# Altium PCB DSKY_keyboard.PcbDoc
Units mm, origin at the board's own origin, x right, y up, seen from the top; angles counter-clockwise.
Board outline 168.42 x 69.64 mm, 2 copper layers (F.Cu, B.Cu); 64 components, 44 nets, 255 pads, 79 vias.
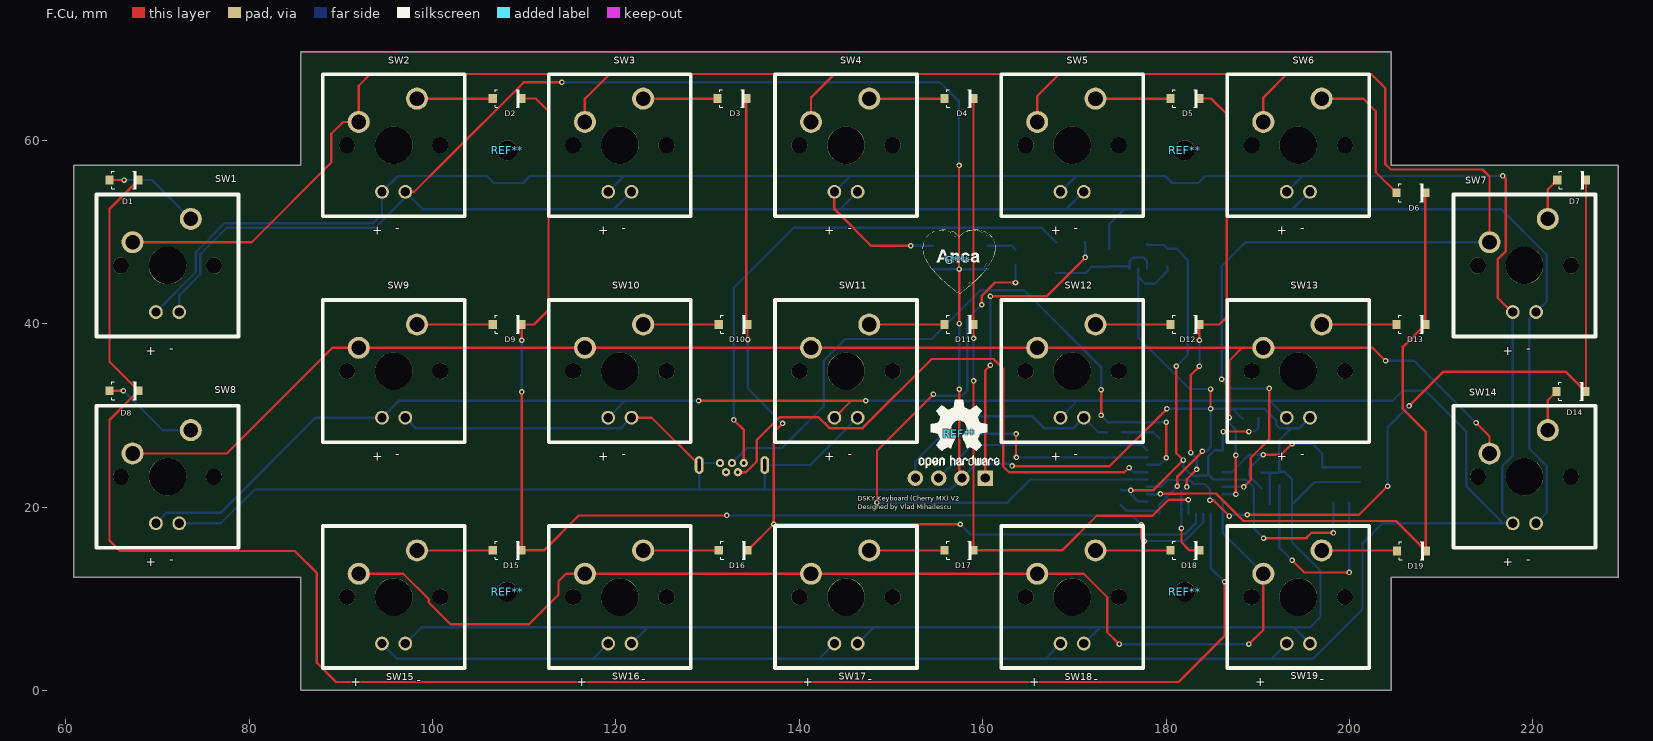
[diagram p0: F.Cu view]
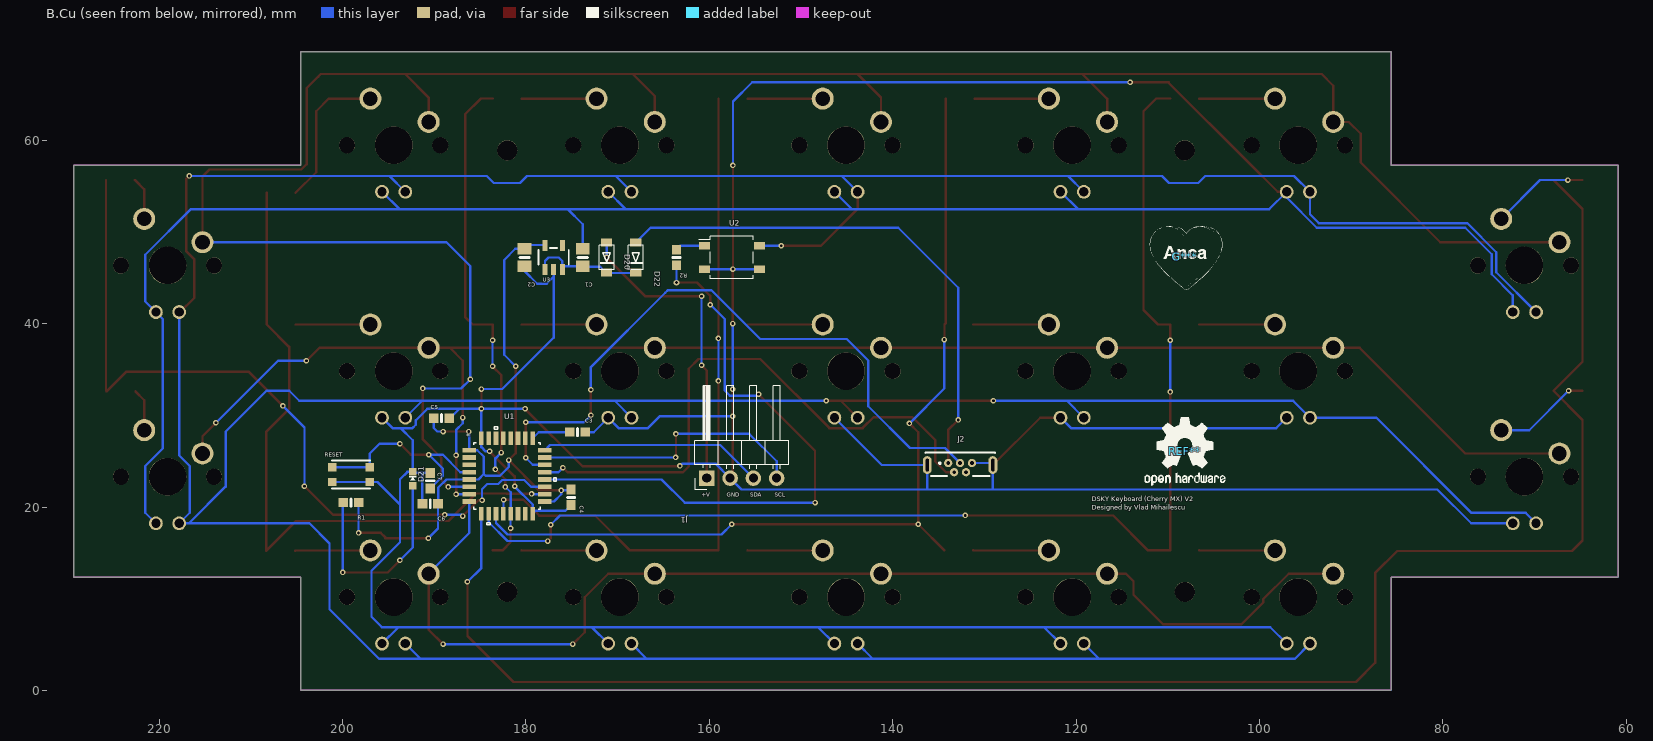
[diagram p1: B.Cu view, seen from below]

## Layer stack, top to bottom
F.Mask: solder mask 0.0102, Solder Resist, Dk 3.5
F.Cu: signal copper 0.0356
Dielectric 1: dielectric 0.32, FR-4, Dk 4.8
B.Cu: signal copper 0.0356
B.Mask: solder mask 0.0102, Solder Resist, Dk 3.5

## Board outline
60.881,12.351 85.622,12.351 85.622,0 204.561,0 204.561,12.351 229.301,12.351 229.301,57.289 204.561,57.289 204.561,69.64 85.622,69.64 85.622,57.289 60.881,57.289 60.881,12.351

## Design rules (kind name [scope] priority, off if disabled: settings)
Clearance "Clearence 2_PadClass" [InPadClass('Pad Class Clearance 2')] p1: gap=2 ignorepadtopadclearanceinfootprint=FALSE
Clearance "Clearence 0.254_NetClass" [InNetClass('Default')] p2: gap=0.254 ignorepadtopadclearanceinfootprint=FALSE
HoleSize "Hole Size (Default)" [All] p1: absolutevalues=TRUE maxlimit=10 minlimit=0.3 maxpercent=80.000 minpercent=20.000
MinimumSolderMaskSliver [All] p1: minsoldermaskwidth=0
PolygonConnect [All] p1: connectstyle=Direct reliefconductorwidth=0.254 reliefentries=4 polygonreliefangle="90 Angle" airgapwidth=0.254
RoutingVias [All] p1: holewidth=0.711 width=1.27 viastyle="Through Hole" minholewidth=0.711 minwidth=1.27 maxholewidth=0.711 maxwidth=1.27
SilkToSilkClearance [All] p1: silktosilkclearance=0
SilkToSolderMaskClearance [IsPad] p1: minsilkscreentomaskgap=0 clearancetoexposedcopper=TRUE
SolderMaskExpansion [All] p1: expansion=0.102 istentingtop=FALSE
Width [All] p1: maxlimit=10 minlimit=0.254 preferedwidth=0.254 minimp=50.000000 maximp=50.000000 favimp=50.000000
26 further rules are at their usual default settings.

## Classes and differential pairs
pad class "Pad Class Clearance 2": REF**-1
net class Default: +3V3 GND Net-(C1-Pad1) Net-(C3-Pad1) Net-(D1-Pad2) Net-(D2-Pad2) Net-(D3-Pad2) Net-(D4-Pad2) Net-(D5-Pad2) Net-(D6-Pad2) Net-(D7-Pad2) Net-(D8-Pad2) Net-(D9-Pad2) Net-(D10-Pad2) Net-(D11-Pad2) Net-(D12-Pad2) Net-(D13-Pad2) Net-(D14-Pad2) Net-(D15-Pad2) Net-(D16-Pad2) Net-(D17-Pad2) Net-(D18-Pad2) Net-(D19-Pad2) Net-(D21-Pad2) Net-(R2-Pad1) Net-(R2-Pad2) Net-(SW1-PadLED+) PA00 PA01 PA02 PA03 PA04 PA05 PA06 PA07 PA08 PA09 PA11 PA12 PA13 PA14 R\E\S\E\T\ VBAT VBUS

## Components (designator, comment, footprint, x,y, rotation, side; value= is the part's Value field where it differs from the comment)
C1 "10uF" 0805-NO 173.799,47.212 r270 bottom
C2 "10uF" 0805-NO 180.149,47.212 r90 bottom
C3 "1uF" 0603-NO 174.371,28.162 r0 bottom
C4 "1uF" 0603-NO 175.07,21.05 r90 bottom
C5 "1uF" 0603-NO 189.205,29.686 r180 bottom
C6 "1uF" 0603-NO 190.436,20.352 r0 bottom
C7 "0.1uF" 0603-NO 190.436,22.867 r270 bottom
D1 "1N4148" SOD-123 66.358,55.658 r180 top
D2 "1N4148" SOD-123 108.14,64.548 r180 top
D3 "1N4148" SOD-123 132.651,64.548 r180 top
D4 "1N4148" SOD-123 157.416,64.548 r180 top
D5 "1N4148" SOD-123 182.054,64.548 r180 top
D6 "1N4148" SOD-123 206.692,54.261 r180 top
D7 "1N4148" SOD-123 224.218,55.658 r180 top
D8 "1N4148" SOD-123 66.358,32.671 r180 top
D9 "1N4148" SOD-123 108.14,39.91 r180 top
D10 "1N4148" SOD-123 132.779,39.91 r180 top
D11 "1N4148" SOD-123 157.416,39.91 r180 top
D12 "1N4148" SOD-123 182.054,39.91 r180 top
D13 "1N4148" SOD-123 206.692,39.91 r180 top
D14 "1N4148" SOD-123 224.155,32.607 r180 top
D15 "1N4148" SOD-123 108.14,15.272 r180 top
D16 "1N4148" SOD-123 132.779,15.272 r180 top
D17 "1N4148" SOD-123 157.416,15.272 r180 top
D18 "1N4148" SOD-123 182.054,15.272 r180 top
D19 "1N4148" SOD-123 206.756,15.208 r180 top
D20 "D_Schottky_30V" SOD-123FL 171.196,47.212 r270 bottom
D21 "LED" CHIPLED_0603_NOOUTLINE 192.341,23.082 r0 bottom
D22 "D_Schottky_30V" SOD-123FL 168.021,47.212 r270 bottom
G*** "LOGO" anca 157.29,46.895 r0 top
G*** "LOGO" anca 108.14,47.276 r0 bottom
J1 "Conn_01x04_Male" PinHeader_1x04_P2.54mm_Horizontal 160.274,23.146 r270 bottom
J2 "614105150721" 614105150721 132.651,24.67 r0 bottom
R1 "1.5K" 0603-NO 199.072,20.479 r180 bottom
R2 "1.1K" 0603-NO 163.576,47.212 r90 bottom
REF** "OSHW-Logo2_9.8x8mm_SilkScreen" OSHW-Logo2_9.8x8mm_SilkScreen 108.14,26.067 r0 bottom
REF** "OSHW-Logo2_9.8x8mm_SilkScreen" OSHW-Logo2_9.8x8mm_SilkScreen 157.416,27.972 r0 top
REF** "MountingHole_2.2mm_M2" MountingHole_2.2mm_M2 108.141,10.744 r0 top
REF** "MountingHole_2.2mm_M2" MountingHole_2.2mm_M2 182.041,10.744 r0 top
REF** "MountingHole_2.2mm_M2" MountingHole_2.2mm_M2 182.041,58.896 r0 top
REF** "MountingHole_2.2mm_M2" MountingHole_2.2mm_M2 108.141,58.896 r0 top
RESET "SWITCH_TACT_SMT4.6X2.8" BTN_KMR2_4.6X2.8 199.072,23.527 r180 bottom
SW1 "SW_SPST_LED" CHERRYMX-NN-LED 71.099,46.339 r0 top
SW2 "SW_SPST_LED" CHERRYMX-NN-LED 95.763,59.455 r0 top
SW3 "SW_SPST_LED" CHERRYMX-NN-LED 120.427,59.455 r0 top
SW4 "SW_SPST_LED" CHERRYMX-NN-LED 145.091,59.455 r0 top
SW5 "SW_SPST_LED" CHERRYMX-NN-LED 169.755,59.455 r0 top
SW6 "SW_SPST_LED" CHERRYMX-NN-LED 194.419,59.455 r0 top
SW7 "SW_SPST_LED" CHERRYMX-NN-LED 219.083,46.339 r0 top
SW8 "SW_SPST_LED" CHERRYMX-NN-LED 71.099,23.301 r0 top
SW9 "SW_SPST_LED" CHERRYMX-NN-LED 95.763,34.82 r0 top
SW10 "SW_SPST_LED" CHERRYMX-NN-LED 120.427,34.82 r0 top
SW11 "SW_SPST_LED" CHERRYMX-NN-LED 145.091,34.82 r0 top
SW12 "SW_SPST_LED" CHERRYMX-NN-LED 169.755,34.82 r0 top
SW13 "SW_SPST_LED" CHERRYMX-NN-LED 194.419,34.82 r0 top
SW14 "SW_SPST_LED" CHERRYMX-NN-LED 219.083,23.301 r0 top
SW15 "SW_SPST_LED" CHERRYMX-NN-LED 95.763,10.185 r0 top
SW16 "SW_SPST_LED" CHERRYMX-NN-LED 120.427,10.185 r0 top
SW17 "SW_SPST_LED" CHERRYMX-NN-LED 145.091,10.185 r0 top
SW18 "SW_SPST_LED" CHERRYMX-NN-LED 169.755,10.185 r0 top
SW19 "SW_SPST_LED" CHERRYMX-NN-LED 194.419,10.185 r0 top
U1 "STM32F042K6T6" STM32F042K6T6 182.054,23.4 r0 bottom
U2 "AQY232SZ" SO-4_4.4x4.3mm_P2.54mm 157.543,47.212 r0 bottom
U3 "AP2112K-3.3" SOT23-5 176.975,47.212 r0 bottom

## Footprints (in the part's own frame and the unit in brackets; to place one, negate y for a bottom-side part, rotate by r counter-clockwise, add the part's x,y. Pads: shape width x height; smd on the part's side, far side on the other; paste and mask are expansions set on the pad)
0603-NO [mm]
  rect 1.075x1 smd mask+0.051: 1(0.85,0) 2(-0.85,0)
  silkscreen extent 0,-0.4 0,0.4
0805-NO [mm]
  rect 1.24x1.5 smd mask+0.051: 1(0.95,0) 2(-0.95,0)
  silkscreen extent 0,-0.51 0,0.51
614105150721 [mm]
  round 0.908 hole 0.4 paste-0.908 mask+0.05: 1(1.3,-0.125) 2(0.65,0.875) 3(0,-0.125) 4(-0.65,0.875) 5(-1.3,-0.125)
  rrect100% 0.97x1.94 hole 1.35 slot 0.35 at 0 deg paste-1.94 mask+0.05: S1(3.575,0.095) S2(-3.575,0.095)
  silkscreen extent -3.8,-1.28 3.8,1.28
anca [mm]
  silkscreen extent -3.8,-3.59 4.08,3.34
BTN_KMR2_4.6X2.8 [mm]
  rect 0.9x0.9 smd mask+0.051: A(-2.05,-0.8) A'(2.05,-0.8) B(-2.05,0.8) B'(2.05,0.8)
  silkscreen extent -2.1,-1.53 2.1,1.53
CHERRYMX-NN-LED [mil]
  round 59.37 hole 39.37 paste-59.37 mask+4: LED+(-50,-200) LED-(50,-200)
  round 94.49 hole 62.99 paste-94.49 mask+4: SIDE(-150,100) UP(100,200)
  round 69 hole 69 paste-69 mask+1.97: Un1(-200,0) Un2(200,0)
  round 161 hole 161 paste-161 mask+1.97: Un3(0,0)
  silkscreen extent -305,-305 305,305
CHIPLED_0603_NOOUTLINE [mm]
  rect 0.8x0.8 smd mask+0.051: 1(0,-0.75) 2(0,0.75)
  silkscreen extent -0.38,-0.27 0.38,0.18
MountingHole_2.2mm_M2 [mm]
  round 2.2 hole 2.2 paste-2.2 mask+1: 1(0,0)
OSHW-Logo2_9.8x8mm_SilkScreen [mm]
  silkscreen extent -4.4,-3.71 4.4,3.73
PinHeader_1x04_P2.54mm_Horizontal [mm]
  rect 1.7x1.7 hole 1 paste-1.7 mask+0.05: 1(0,0)
  rrect100% 1.7x1.7 hole 1 paste-1.7 mask+0.05: 2(0,2.54) 3(0,5.08) 4(0,7.62)
  silkscreen extent -10.1,-1.33 1.27,8.95
SO-4_4.4x4.3mm_P2.54mm [mm]
  rect 1.2x0.8 smd mask+0.05: 1(3,-1.27) 2(3,1.27) 3(-3,1.27) 4(-3,-1.27)
  silkscreen extent -2.35,-2.3 3.6,2.3
SOD-123 [mm]
  rect 0.9x0.95 smd mask+0.05: 1(-1.575,0) 2(1.575,0)
  silkscreen extent -1.33,-0.97 1.33,0.97
SOD-123FL [mm]
  rect 0.91x1.22 smd mask+0.051: 1(1.637,0) 2(-1.637,0)
  silkscreen extent -1.35,-0.82 1.35,0.82
SOT23-5 [mm]
  rect 0.55x1.2 smd mask+0.051: 1(0.95,1.3) 2(0,1.3) 3(-0.95,1.3) 4(-0.95,-1.3) 5(0.95,-1.3)
  silkscreen extent -1.65,-1.05 1.65,0.8
STM32F042K6T6 [mm]
  rect 1.462x0.507 smd mask+0.05: 1(4.115,-2.8) 2(4.115,-2) 3(4.115,-1.2) 4(4.115,-0.4) 5(4.115,0.4) 6(4.115,1.2) 7(4.115,2) 8(4.115,2.8) 17(-4.115,2.8) 18(-4.115,2) 19(-4.115,1.2) 20(-4.115,0.4) 21(-4.115,-0.4) 22(-4.115,-1.2) 23(-4.115,-2) 24(-4.115,-2.8)
  rect 0.507x1.462 smd mask+0.05: 9(2.8,4.115) 10(2,4.115) 11(1.2,4.115) 12(0.4,4.115) 13(-0.4,4.115) 14(-1.2,4.115) 15(-2,4.115) 16(-2.8,4.115) 25(-2.8,-4.115) 26(-2,-4.115) 27(-1.2,-4.115) 28(-0.4,-4.115) 29(0.4,-4.115) 30(1.2,-4.115) 31(2,-4.115) 32(2.8,-4.115)
  silkscreen extent -5.35,-5.35 3.63,5.35

## Part data
C1 C2: library part 0805-NO
C3 C4 C5 C6 C7 R1 R2: library part 0603-NO
D1 D2 D3 D4 D5 D6 D7 D8 D9 D10 D11 D12 D13 D14 D15 D16 D17 D18 D19: library part SOD-123
D20 D22: library part SOD-123FL
D21: library part CHIPLED_0603_NOOUTLINE
G*** G***: library part anca
J1: library part PinHeader_1x04_P2.54mm_Horizontal, "Through hole angled pin header, 1x04, 2.54mm pitch, 6mm pin length, single row"
J2: "<b>WR-COM</b><br> Micro USB 2.0 Type B Vertical 5 Contacts"
REF** REF**: "Open Source Hardware Symbol"
REF** REF** REF** REF**: "Mounting Hole 2.2mm, no annular, M2"
RESET: library part BTN_KMR2_4.6X2.8
SW1 SW2 SW3 SW4 SW5 SW6 SW7 SW8 SW9 SW10 SW11 SW12 SW13 SW14 SW15 SW16 SW17 SW18 SW19: library part CHERRYMX-NN-LED
U2: library part SO-4_4.4x4.3mm_P2.54mm, "4-Lead Plastic Small Outline (SO), see https://docs.broadcom.com/docs/AV02-0173EN"
U3: library part SOT23-5, "<b>Small Outline Transistor</b> - 5 Pin"

## Via types
v1: diameter 0.6, hole 0.3, F.Cu to B.Cu, tented both sides, 79 vias

## Nets (pads, with @x,y where several pads share a name; then routed paths per layer and width w, separated by ;. In a path a pad name is that pad's centre, name@x,y a point inside that pad or via, vN(x,y) a via of type N, cw(c..) or ccw(c..) an arc to the next point about the centre after c; other vN are vias at no path point)
+3V3: C2.1 C4.1 C5.2 C6.2 R1.1 U1.1 U1.5 U1.17 U3.5 | length 76.3
  F.Cu w0.254: v1(176.149,21.812) 178.562,21.812 v1(181.864,25.114) 181.102,25.876 181.102,32.607 v1(181.102,35.338) ; v1(186.245,28.226) v1(189.04,28.226) ; v1(190.627,16.605) 195.326,16.605 195.326,16.669 195.834,17.177 v1(198.247,17.177)
  B.Cu w0.254: C4.1 175.158,21.812 v1(176.149,21.812) ; v1@176.124,21.837 v1(176.149,21.812) ; U1.17 176.937,20.6 176.149,21.388 v1(176.149,21.812) ; U3.5@178.021,48.673 177.925,48.576 179.736,48.576 C2.1 181.154,48.162 182.372,46.944 182.372,36.608 v1(181.102,35.338) ; v1(181.864,25.114) 181.864,24.372 182.826,23.41 184.415,23.41 184.594,23.59 ; U1.5@186.15,23.019 U1.5 ; v1(186.245,28.226) 186.169,28.15 U1.1 185.299,26.2 184.594,25.496 184.594,23.59 ; v1(189.04,28.226) 189.674,28.226 190.055,28.607 C5.2 ; v1(190.627,16.605) 189.586,17.646 C6.2 189.555,20.383 189.555,22.114 188.669,23 U1.5 ; R1.1 198.247,20.454 v1(198.247,17.177) ; 184.594,23.59 185.184,23 U1.5
GND: C1.2 C2.2 C3.2 C4.2 C5.1 C6.1 C7.2 D21.1 J1.2 J2.5 J2.S1 J2.S2 RESET.A RESET.A' SW1.LED- SW2.LED- SW3.LED- SW4.LED- SW5.LED- SW6.LED- SW7.LED- SW8.LED- SW9.LED- SW10.LED- SW11.LED- SW12.LED- SW13.LED- SW14.LED- SW15.LED- SW16.LED- SW17.LED- SW18.LED- SW19.LED- U1.16 U1.32 U2.2 U2.3 U3.2 | length 725.8
  F.Cu w0.254: SW2.LED- 98.003,54.375 101.237,57.609 ; 100.658,57.029 101.237,57.609 ; v1(114.109,66.326) 109.883,66.326 109.883,66.254 101.237,57.609 ; SW10.LED- 123.911,29.74 J2.S2 ; v1@157.416,40.037 v1(157.448,40.005) ; v1(157.416,57.245) v1(157.416,45.942) 157.448,45.911 v1(157.448,40.005) ; v1(157.448,32.83) v1(157.448,29.909) 157.448,23.432 J1.2 ; v1@157.48,39.973 v1(157.448,40.005) ; v1(163.195,24.479) 163.241,24.433 173.817,24.433 v1(180.086,30.702) ; v1(181.229,22.257) 181.229,23.336 v1(183.959,26.067) ; v1(184.849,30.702) v1(184.849,32.861)
  B.Cu w0.254: SW8.LED- 76.912,18.221 80.606,21.915 129.071,21.915 ; SW1.LED-@72.418,41.307 SW1.LED- 72.369,43.081 74.676,45.387 74.676,47.574 77.553,50.451 93.746,50.451 97.033,53.738 SW2.LED- 98.925,52.483 99.758,52.483 118.681,52.483 ; SW15.LED- 98.818,6.89 123.698,6.89 ; SW9.LED- 98.168,28.605 120.562,28.605 SW10.LED- ; v1(114.109,66.326) 155.321,66.326 157.416,64.23 157.416,63.468 v1(157.416,57.245) ; SW16.LED- 123.482,6.89 123.698,6.89 ; SW3.LED- 119.805,52.483 118.681,52.483 ; J2.5 129.297,24.795 J2.S2 129.077,21.92 129.071,21.915 ; J2.S1@136.006,24.795 J2.S1 ; SW17.LED- 148.082,6.826 148.082,6.89 ; SW11.LED- 141.196,24.575 J2.S1 ; SW4.LED- 144.469,52.483 143.002,52.483 ; U2.3 v1(157.416,45.942) U2.2 ; v1(157.448,29.909) 165.386,29.909 166.69,28.605 169.89,28.605 SW12.LED- 172.602,28.162 C3.2 ; v1(157.448,32.83) v1(157.448,40.005) ; v1(163.195,24.479) 162.941,24.733 159.321,24.733 J1.2 156.503,21.915 136.246,21.915 ; SW18.LED- 172.784,6.864 172.784,6.89 ; SW5.LED- 169.133,52.483 167.894,52.483 ; C1.2 173.799,50.832 175.451,52.483 ; C4.2 175.68,19.59 178.95,19.59 U1.16 179.255,20.27 181.229,22.245 v1(181.229,22.257) ; v1(180.086,30.702) 187.261,30.702 ; C2.2 180.149,45.752 178.752,44.355 177.737,44.355 176.975,45.117 176.975,45.976 176.975,38.458 182.571,32.861 v1(184.849,32.861) ; v1(183.959,26.067) 184.392,26.067 184.854,26.53 U1.32 184.854,30.696 v1(184.849,30.702) ; C5.1 188.278,29.686 187.261,30.702 ; C7.2 191.326,23.717 ; C6.1 191.318,20.383 191.318,23.71 191.326,23.717 ; 193.904,6.89 SW19.LED- ; SW13.LED-@195.578,29.74 SW13.LED- 194.553,28.605 193.677,28.605 ; SW6.LED- 193.797,52.483 190.817,52.483 ; RESET.A RESET.A' 196.177,22.727 193.738,20.288 ; SW14.LED- 221.508,19.377 221.508,24.465 219.599,26.375 219.599,40.505 SW7.LED- 221.508,42.415 221.508,47.503 216.529,52.483 195.707,52.483 190.817,52.483 ; 118.681,52.483 121.666,52.483 143.002,52.483 ; 123.698,6.89 146.431,6.89 148.082,6.89 ; 129.071,21.915 134.835,21.915 136.246,21.915 ; J2.S1 136.226,21.935 136.246,21.915 ; 143.002,52.483 146.368,52.483 167.894,52.483 ; 148.082,6.89 168.275,6.89 171.069,6.89 172.784,6.89 ; 167.894,52.483 171.069,52.483 175.451,52.483 ; 172.784,6.89 195.707,6.89 196.844,8.027 196.844,13.039 193.738,16.145 193.738,19.717 193.738,20.288 ; 175.451,52.483 190.817,52.483 ; 187.261,30.702 190.763,30.702 190.763,30.694 192.013,29.443 192.013,28.972 192.38,28.605 193.677,28.605 ; 191.326,23.717 192.226,23.717 D21.1 ; D21.1 192.341,27.269 193.677,28.605 ; D21.1 192.925,23.832 193.738,23.019 193.738,22.003 193.738,20.288
Net-(C1-Pad1): C1.1 D20.1 D22.1 U3.1 U3.3 | length 12.8
  B.Cu w0.254: D22.1 168.084,45.511 D20.1@171.196,45.511 ; D20.1@171.132,45.575 D20.1@171.196,45.511 ; U3.3@175.801,46.199 U3.3@176.024,45.976 ; U3.1@177.925,45.976 177.925,46.83 177.542,47.212 176.407,47.212 176.024,46.83 U3.3@176.024,45.976 ; D20.1@171.196,45.511 171.883,46.199 173.736,46.199 C1.1 175.738,46.262 U3.3@176.024,45.976
Net-(C3-Pad1): C3.1 U1.25 | length 4.3
  B.Cu w0.254: C3.1 178.607,28.162 U1.25
Net-(D1-Pad2): D1.2 SW1.UP | length 10.6
  F.Cu w0.254: D1.2 v1(66.358,55.658)
  B.Cu w0.254: v1(66.358,55.658) 69.4,55.658 SW1.UP
Net-(D2-Pad2): D2.2 SW2.UP | length 8.3
  F.Cu w0.254: SW2.UP 106.552,64.535 D2.2
Net-(D3-Pad2): D3.2 SW3.UP | length 8.1
  F.Cu w0.254: SW3.UP 131.063,64.535 D3.2
Net-(D4-Pad2): D4.2 SW4.UP | length 8.2
  F.Cu w0.254: SW4.UP 155.828,64.535 D4.2
Net-(D5-Pad2): D5.2 SW5.UP | length 8.2
  F.Cu w0.254: SW5.UP 180.466,64.535 D5.2
Net-(D6-Pad2): D6.2 SW6.UP | length 16.3
  F.Cu w0.254: SW6.UP 201.498,64.535 202.87,63.164 202.87,56.509 D6.2
Net-(D7-Pad2): D7.2 SW7.UP | length 4.7
  F.Cu w0.254: SW7.UP 221.623,54.637 D7.2
Net-(D8-Pad2): D8.2 SW8.UP | length 10.6
  F.Cu w0.254: D8.2 v1(66.294,32.671)
  B.Cu w0.254: v1(66.294,32.671) 70.584,28.381 SW8.UP
Net-(D9-Pad2): D9.2 SW9.UP | length 8.3
  F.Cu w0.254: SW9.UP 106.555,39.9 D9.2
Net-(D10-Pad2): D10.2 SW10.UP | length 8.2
  F.Cu w0.254: SW10.UP 131.193,39.9 D10.2
Net-(D11-Pad2): D11.2 SW11.UP | length 8.2
  F.Cu w0.254: SW11.UP 155.831,39.9 D11.2
Net-(D12-Pad2): D12.2 SW12.UP | length 8.2
  F.Cu w0.254: SW12.UP 180.469,39.9 D12.2
Net-(D13-Pad2): D13.2 SW13.UP | length 8.2
  F.Cu w0.254: SW13.UP@196.999,39.859 SW13.UP 205.107,39.9 D13.2
Net-(D14-Pad2): D14.2 SW14.UP | length 4.6
  F.Cu w0.254: SW14.UP 221.623,31.65 D14.2
Net-(D15-Pad2): D15.2 SW15.UP | length 8.3
  F.Cu w0.254: SW15.UP 106.558,15.265 D15.2
Net-(D16-Pad2): D16.2 SW16.UP | length 8.2
  F.Cu w0.254: SW16.UP 131.196,15.265 D16.2
Net-(D17-Pad2): D17.2 SW17.UP | length 8.2
  F.Cu w0.254: SW17.UP 155.834,15.265 D17.2
Net-(D18-Pad2): D18.2 SW18.UP | length 8.2
  F.Cu w0.254: SW18.UP 180.472,15.265 D18.2
Net-(D19-Pad2): D19.2 SW19.UP | length 8.2
  F.Cu w0.254: SW19.UP 205.124,15.265 D19.2
Net-(D21-Pad2): D21.2 R1.2 | length 23.1
  F.Cu w0.254: v1(193.738,14.192) 195.072,12.859 v1(199.962,12.859)
  B.Cu w0.254: D21.2 192.341,15.843 192.341,15.589 v1(193.738,14.192) ; R1.2 199.962,20.44 v1(199.962,12.859)
Net-(R2-Pad1): R2.1 U2.1 | length 3.2
  B.Cu w0.254: U2.1 163.156,48.482 R2.1
Net-(R2-Pad2): R2.2 U1.20 | length 66
  F.Cu w0.254: v1(148.463,20.479) 148.463,26.13 v1(154.623,32.29) ; v1(159.893,42.069) 159.893,43.027 161.348,44.482 v1(163.576,44.482)
  B.Cu w0.254: v1(148.463,20.479) 162.687,20.479 165.208,23 U1.20 ; v1(154.623,32.29) 154.764,32.149 157.775,32.149 158.323,32.697 158.323,40.499 v1(159.893,42.069) ; v1(163.576,44.482) R2.2
Net-(SW1-PadLED+): SW1.LED+ SW2.LED+ SW3.LED+ SW4.LED+ SW5.LED+ SW6.LED+ SW7.LED+ SW8.LED+ SW9.LED+ SW10.LED+ SW11.LED+ SW12.LED+ SW13.LED+ SW14.LED+ SW15.LED+ SW16.LED+ SW17.LED+ SW18.LED+ SW19.LED+ U2.4 | length 554.7
  F.Cu w0.254: v1(129.017,31.576) 143.812,31.576 146.319,31.576 ; SW11.LED+ 145.657,31.576 146.319,31.576 ; SW4.LED+ 143.821,52.49 147.828,48.482 v1(152.146,48.482) ; v1(147.241,31.576) 146.319,31.576 ; SW19.LED+ SW19.LED+@193.167,5.086 ; v1(216.725,56.102) 217.025,55.802 217.025,47.872 216.154,47.001 216.154,42.831 217.726,41.259 SW7.LED+
  B.Cu w0.254: SW8.LED+ 70.965,19.356 76.863,19.356 87.247,29.74 SW9.LED+ 96.329,31.576 119.141,31.576 121.745,31.576 ; SW1.LED+ 74.168,45.597 74.168,47.784 77.343,50.959 93.535,50.959 94.493,51.917 94.493,52.171 SW2.LED+ 96.221,56.102 105.918,56.102 106.68,55.34 109.855,55.34 110.617,56.102 119.444,56.102 ; SW15.LED+ 96.137,3.461 116.713,3.461 ; 119.126,56.102 119.444,56.102 ; SW16.LED+ 117.513,3.461 116.713,3.461 ; SW10.LED+ 120.993,31.576 121.745,31.576 ; SW3.LED+ 120.885,56.102 122.809,56.102 ; v1(129.017,31.576) 121.745,31.576 ; SW17.LED+ 142.177,3.461 141.224,3.461 ; SW4.LED+ 145.548,56.102 147.764,56.102 ; v1(147.241,31.576) 168.481,31.576 170.957,31.576 ; v1(152.146,48.482) U2.4 ; SW18.LED+ 166.841,3.461 165.862,3.461 ; SW12.LED+ 170.321,31.576 170.957,31.576 ; SW5.LED+ 170.212,56.102 173.101,56.102 ; SW19.LED+ 191.504,3.461 ; SW13.LED+ 191.312,31.576 190.261,31.576 ; SW6.LED+ 194.876,56.102 196.723,56.102 ; 194.985,31.576 195.976,31.576 ; v1(216.725,56.102) 196.723,56.102 ; SW14.LED+@217.777,18.256 SW14.LED+ ; SW7.LED+ 217.813,25.621 216.657,24.465 216.657,19.377 SW14.LED+ ; 116.713,3.461 125.222,3.461 141.224,3.461 ; 119.444,56.102 122.809,56.102 ; 122.809,56.102 143.764,56.102 147.764,56.102 ; 141.224,3.461 165.862,3.461 ; 147.764,56.102 168.465,56.102 173.101,56.102 ; 165.862,3.461 190.754,3.461 191.504,3.461 ; 170.957,31.576 190.261,31.576 ; 173.101,56.102 179.895,56.102 180.657,55.34 183.515,55.34 184.277,56.102 196.723,56.102 ; 190.261,31.576 193.152,31.576 195.976,31.576 ; 191.504,3.461 196.024,3.461 201.422,8.858 201.422,16.034 203.609,18.221 SW14.LED+ ; 195.976,31.576 204.709,31.576 205.803,32.671 208.28,32.671 212.745,28.206 212.745,25.793 212.745,22.222 216.746,18.221 SW14.LED+
PA00: SW1.SIDE SW2.SIDE SW3.SIDE SW4.SIDE SW5.SIDE SW6.SIDE SW7.SIDE U1.6 | length 265.2
  F.Cu w0.254: SW1.SIDE@67.846,49.435 SW1.SIDE 80.279,48.879 88.963,57.563 88.963,60.702 90.256,61.995 SW2.SIDE ; SW2.SIDE@91.94,62.008 SW2.SIDE ; SW3.SIDE@116.522,62.09 SW3.SIDE 116.617,64.516 119.316,67.215 ; SW4.SIDE 141.281,64.668 143.827,67.215 ; SW5.SIDE 165.945,64.821 168.338,67.215 ; v1(188.468,22.193) 189.23,22.955 189.23,25.368 191.262,27.4 v1(191.262,32.925) ; SW6.SIDE 190.609,64.657 193.167,67.215 ; 202.394,67.196 202.66,66.929 ; SW7.SIDE 215.273,55.777 215.273,56.031 214.503,56.801 204.492,56.801 203.898,57.394 203.898,65.691 202.66,66.929 ; SW2.SIDE 91.953,65.95 93.218,67.215 116.522,67.215 119.316,67.215 ; 119.316,67.215 141.274,67.215 143.827,67.215 ; 143.827,67.215 165.989,67.215 168.338,67.215 ; 168.338,67.215 193.167,67.215 ; 193.167,67.215 202.374,67.215 202.66,66.929
  B.Cu w0.254: U1.6 186.176,22.193 v1(188.468,22.193) ; v1(191.262,32.925) 187.071,32.925 v1(186.055,33.941) 186.055,46.26 188.674,48.879 SW7.SIDE
PA01: SW8.SIDE SW9.SIDE SW10.SIDE SW11.SIDE SW12.SIDE SW13.SIDE SW14.SIDE U1.7 | length 178.6
  F.Cu w0.254: SW8.SIDE 77.562,25.841 89.081,37.36 SW9.SIDE SW10.SIDE SW11.SIDE SW12.SIDE 188.287,37.36 ; v1(186.88,29.75) 186.88,35.953 188.287,37.36 ; v1(187.611,21.4) v1(187.611,25.655) ; 188.911,37.36 SW13.SIDE ; v1@203.962,35.909 v1(203.93,35.941) 202.511,37.36 SW13.SIDE ; v1(213.804,29.178) 215.273,27.71 SW14.SIDE ; 188.287,37.36 SW13.SIDE
  B.Cu w0.254: U1.7 v1(187.611,21.4) ; v1(186.88,29.75) 186.88,29.123 187.611,28.393 v1(187.611,25.655) ; v1(203.93,35.941) 207.042,35.941 v1(213.804,29.178)
PA02: SW15.SIDE SW16.SIDE SW17.SIDE SW18.SIDE SW19.SIDE U1.8 | length 126.2
  F.Cu w0.254: SW15.SIDE 96.813,12.725 99.586,9.952 99.586,9.581 101.96,7.207 110.509,7.207 113.728,10.427 113.728,11.906 114.547,12.725 SW16.SIDE SW17.SIDE SW18.SIDE 171.013,12.725 173.577,10.16 173.577,6.35 v1(174.879,5.048) ; v1(189.04,5.048) 190.609,6.618 SW19.SIDE
  B.Cu w0.254: v1(174.879,5.048) v1(189.04,5.048) ; U1.8 186.169,17.164 SW19.SIDE
PA03: D1.1 D8.1 U1.9 | length 193
  F.Cu w0.254: D1.1 64.762,52.488 64.762,35.841 D8.1 64.762,29.501 64.762,16.359 65.913,15.208 84.963,15.208 87.385,12.787 87.385,3.008 89.471,0.921 181.356,0.921 186.373,5.937 v1(186.373,11.843)
  B.Cu w0.254: U1.9@184.849,19.279 U1.9 184.854,13.361 v1(186.373,11.843)
PA04: D2.1 D9.1 D15.1 U1.10 | length 133.1
  F.Cu w0.254: D2.1 111.252,64.548 112.649,63.151 112.649,41.497 111.061,39.91 D9.1 109.716,38.208 v1(109.728,38.195) ; v1(109.728,32.544) 109.728,15.284 D15.1 112.141,15.272 115.951,19.082 v1(132.08,19.082) ; v1(177.292,18.066) 177.292,16.605 v1(177.609,16.288)
  B.Cu w0.254: v1(109.728,32.544) v1(109.728,38.195) ; v1(132.08,19.082) 175.133,19.082 176.276,19.082 v1(177.292,18.066) ; v1(177.609,16.288) 182.003,16.288 184.055,18.34 U1.10
PA05: D3.1 D10.1 D16.1 U1.11 | length 100.6
  F.Cu w0.254: D3.1 134.227,40.037 D10.1 134.354,38.271 v1(134.366,38.259) ; D16.1@134.366,15.284 D16.1 v1@137.211,18.129 ; v1(138.176,29.115) 137.211,28.15 v1@137.211,18.129 ; v1(157.543,18.129) v1(137.224,18.129) v1@137.211,18.129
  B.Cu w0.254: v1(134.366,38.259) 134.366,32.925 v1(138.176,29.115) ; v1(157.543,18.129) 158.669,17.004 182,17.004 183.255,18.258 U1.11
PA06: D4.1 D11.1 D17.1 U1.12 | length 76.6
  F.Cu w0.254: D4.1 D11.1 158.992,38.398 v1(159.004,38.386) ; D17.1@159.004,15.284 D17.1 ; v1(159.004,33.75) 158.992,33.738 D17.1 ; v1(182.435,20.796) 180.276,20.796 178.53,19.05 172.434,19.05 168.656,15.272 D17.1
  B.Cu w0.254: v1(159.004,33.75) v1(159.004,38.386) ; v1(182.435,20.796) 182.435,19.304 U1.12
PA07: D5.1 D12.1 D18.1 U1.13 | length 57.2
  F.Cu w0.254: v1(181.673,17.685) 181.673,16.161 182.562,15.272 D18.1 ; v1(182.245,22.193) 182.245,23.019 v1(183.325,24.098) ; v1(182.689,25.94) 182.689,34.385 v1(183.642,35.338) ; D5.1 184.912,64.548 186.626,62.833 186.626,40.735 185.801,39.91 D12.1 183.63,38.208 v1(183.642,38.195)
  B.Cu w0.254: v1(181.673,17.685) 181.673,19.266 U1.13 ; U1.13@181.754,19.734 181.655,19.634 U1.13 ; v1@182.308,22.257 v1(182.245,22.193) 181.655,21.603 U1.13 ; v1(182.689,25.94) 183.325,25.305 v1(183.325,24.098) ; v1(183.642,35.338) v1(183.642,38.195)
PA08: D6.1 D13.1 D19.1 U1.18 | length 74.2
  F.Cu w0.254: v1@179.434,21.478 v1(179.387,21.431) 182.063,21.431 182.109,21.478 185.429,21.478 188.442,18.464 205.075,18.464 D19.1 208.331,28.183 205.821,30.693 205.821,37.463 D13.1 ; D13.1@208.258,39.9 D13.1 ; D6.1 D13.1
  B.Cu w0.254: U1.18@177.971,21.431 U1.18 179.356,21.4 v1(179.387,21.431)
PA09: D7.1 D14.1 U1.19 | length 84.7
  F.Cu w0.254: v1(184.785,20.733) 185.166,20.733 v1(186.88,19.018) ; v1(188.849,19.145) 201.041,19.145 v1(204.153,22.257) ; v1(206.502,31.02) 210.248,34.766 223.571,34.766 D14.1 225.794,32.671 D7.1
  B.Cu w0.254: U1.19 179.445,22.2 180.183,22.938 182.58,22.938 183.007,22.511 184.214,22.511 184.785,21.939 v1(184.785,20.733) ; v1(186.88,19.018) 187.007,19.145 v1(188.849,19.145) ; v1(204.153,22.257) 204.153,28.67 v1(206.502,31.02)
PA11: J2.2 U1.21 | length 63.9
  F.Cu w0.254: J2.2 134.187,23.795 135.36,24.968 135.36,27.307 137.849,29.796 142.085,29.796 143.276,28.605 146.906,28.605 154.447,36.146 161.172,36.146 162.243,35.076 162.243,24.424 162.868,23.798 175.468,23.798 v1(175.958,24.289)
  B.Cu w0.254: v1(175.958,24.289) 176.448,23.8 U1.21
PA12: J2.3 U1.22 | length 73.4
  F.Cu w0.254: v1(172.91,30.004) v1(172.91,32.798) ; v1(180.022,25.368) v1(180.022,29.242)
  B.Cu w0.254: J2.3 134.291,26.434 138.117,26.434 142.665,30.983 142.665,35.984 145,38.319 154.442,38.319 159.776,43.653 164.512,43.653 164.804,43.361 172.91,35.254 v1(172.91,32.798) ; v1(172.91,30.004) 173.672,29.242 v1(180.022,29.242) ; U1.22 179.254,24.6 v1(180.022,25.368)
PA13: J1.4 U1.23 | length 30.9
  F.Cu w0.254: v1(163.639,27.972) 163.639,25.432 v1(163.672,25.4)
  B.Cu w0.254: J1.4 152.654,24.987 155.638,27.972 v1(163.639,27.972) ; v1(163.672,25.4) U1.23
PA14: J1.3 U1.24 | length 24.5
  B.Cu w0.254: J1.3 158.814,26.765 177.374,26.765 U1.24
R\E\S\E\T\: C7.1 RESET.B RESET.B' U1.4 | length 23.1
  F.Cu w0.254: v1(190.588,25.711) 192.557,25.711 v1(193.738,26.892)
  B.Cu w0.254: U1.4 187.154,23.8 189.065,25.711 v1(190.588,25.711) ; C7.1 189.065,23.389 189.065,24.187 v1(190.588,25.711) ; v1@190.602,25.711 v1(190.588,25.711) ; v1(193.738,26.892) 195.961,26.892 197.022,25.831 RESET.B' RESET.B
VBAT: D22.2 J2.1 | length 58.1
  F.Cu w0.254: v1(132.842,29.496) 133.951,28.386 J2.1
  B.Cu w0.254: v1(132.842,29.496) 132.842,43.91 139.382,50.451 166.42,50.451 D22.2
VBUS: D20.2 J1.1 | length 33.9
  F.Cu w0.254: J1.1 160.274,34.893 v1(160.845,35.465) ; v1(160.845,42.971) 166.955,42.971 v1(171.196,47.212)
  B.Cu w0.254: v1(160.845,35.465) v1(160.845,42.971) ; D20.2@171.119,48.863 171.196,48.786 v1(171.196,47.212)
pads on no net: J2.4 REF**.1 SW1.Un1 SW1.Un2 SW1.Un3 SW2.Un1 SW2.Un2 SW2.Un3 SW3.Un1 SW3.Un2 SW3.Un3 SW4.Un1 SW4.Un2 SW4.Un3 SW5.Un1 SW5.Un2 SW5.Un3 SW6.Un1 SW6.Un2 SW6.Un3 SW7.Un1 SW7.Un2 SW7.Un3 SW8.Un1 SW8.Un2 SW8.Un3 SW9.Un1 SW9.Un2 SW9.Un3 SW10.Un1 SW10.Un2 SW10.Un3 SW11.Un1 SW11.Un2 SW11.Un3 SW12.Un1 SW12.Un2 SW12.Un3 SW13.Un1 SW13.Un2 SW13.Un3 SW14.Un1 SW14.Un2 SW14.Un3 SW15.Un1 SW15.Un2 SW15.Un3 SW16.Un1 SW16.Un2 SW16.Un3 SW17.Un1 SW17.Un2 SW17.Un3 SW18.Un1 SW18.Un2 SW18.Un3 SW19.Un1 SW19.Un2 SW19.Un3 U1.2 U1.3 U1.14 U1.15 U1.26 U1.27 U1.28 U1.29 U1.30 U1.31 U3.4

## Keep-outs
Edge.Cuts:
  lines w0.025: 85.622,0 204.561,0 ; 85.622,0 85.622,12.351 ; 85.622,0 204.561,0 ; 85.622,0 85.622,12.351 ; 85.622,12.351 60.881,12.351 85.622,12.351 ; 85.622,57.289 60.881,57.289 85.622,57.289 ; 85.622,57.289 85.622,69.64 ; 85.622,57.289 85.622,69.64 ; 85.622,69.64 204.561,69.64 ; 85.622,69.64 204.561,69.64 ; 204.561,0 204.561,12.351 ; 204.561,0 204.561,12.351 ; 204.561,12.351 229.301,12.351 ; 204.561,12.351 229.301,12.351 ; 204.561,57.289 204.561,69.64 ; 204.561,57.289 229.301,57.289 ; 204.561,57.289 204.561,69.64 ; 204.561,57.289 229.301,57.289 ; 229.301,12.351 229.301,57.289 ; 229.301,12.351 229.301,57.289
  lines w0.05: 60.881,12.351 60.881,57.289 60.881,12.351

## Silkscreen, mask and mechanical layers (free items; w line width, h text height)
F.SilkS:
  text "DSKY Keyboard (Cherry MX) V2 / Designed by Vlad Mihailescu" at 146.368,19.55 h0.9
B.SilkS:
  text "SCL" at 152.869,20.964 h0.75
  text "SDA" at 155.511,20.964 h0.75
  text "GND" at 158.1,20.964 h0.75
  text "+V" at 160.803,20.967 h0.75
  text "DSKY Keyboard (Cherry MX) V2 / Designed by Vlad Mihailescu" at 118.3,19.486 h0.9

## Text inside footprints (layer, text, board x,y; h text height)
SW1: F.SilkS "-" at 71.29,36.502 h1.69; F.SilkS "+" at 68.75,36.229 h1.69
SW2: F.SilkS "-" at 95.954,49.618 h1.69; F.SilkS "+" at 93.414,49.345 h1.69
SW3: F.SilkS "-" at 120.618,49.618 h1.69; F.SilkS "+" at 118.078,49.345 h1.69
SW4: F.SilkS "-" at 145.281,49.618 h1.69; F.SilkS "+" at 142.741,49.345 h1.69
SW5: F.SilkS "-" at 169.945,49.618 h1.69; F.SilkS "+" at 167.405,49.345 h1.69
SW6: F.SilkS "-" at 194.609,49.618 h1.69; F.SilkS "+" at 192.069,49.345 h1.69
SW7: F.SilkS "-" at 219.273,36.502 h1.69; F.SilkS "+" at 216.733,36.229 h1.69
SW8: F.SilkS "-" at 71.29,13.464 h1.69; F.SilkS "+" at 68.75,13.191 h1.69
SW9: F.SilkS "-" at 95.954,24.983 h1.69; F.SilkS "+" at 93.414,24.71 h1.69
SW10: F.SilkS "-" at 120.618,24.983 h1.69; F.SilkS "+" at 118.078,24.71 h1.69
SW11: F.SilkS "-" at 145.281,24.983 h1.69; F.SilkS "+" at 142.741,24.71 h1.69
SW12: F.SilkS "-" at 169.945,24.983 h1.69; F.SilkS "+" at 167.405,24.71 h1.69
SW13: F.SilkS "-" at 194.609,24.983 h1.69; F.SilkS "+" at 192.069,24.71 h1.69
SW14: F.SilkS "-" at 219.273,13.464 h1.69; F.SilkS "+" at 216.733,13.191 h1.69
SW15: F.SilkS "-" at 98.298,0.355 h1.69; F.SilkS "+" at 91.059,0.145 h1.69
SW16: F.SilkS "-" at 122.777,0.475 h1.69; F.SilkS "+" at 115.728,0.138 h1.69
SW17: F.SilkS "-" at 147.44,0.475 h1.69; F.SilkS "+" at 140.392,0.138 h1.69
SW18: F.SilkS "-" at 172.104,0.475 h1.69; F.SilkS "+" at 165.056,0.138 h1.69
SW19: F.SilkS "-" at 196.768,0.475 h1.69; F.SilkS "+" at 189.72,0.138 h1.69
U1: B.SilkS "*" at 186.495,27.157 h1; Dwgs.User "0.031in/0.8mm" at 172.709,25.514 h1; Dwgs.User "0.02in/0.507mm" at 177.301,30.658 h1; Dwgs.User "0.058in/1.462mm" at 170.857,27.229 h1; Dwgs.User "0.324in/8.23mm" at 189.195,23.114 h1; Dwgs.User "0.324in/8.23mm" at 180.101,14.301 h1; B.Fab "*" at 185.301,26.483 h1; B.Fab "*" at 185.301,26.483 h1; Cmts.User "Copyright 2016 Accelerated Designs. All rights reserved." at 181.193,23.351 h0.13